# Altium PCB PrototypeV2.PcbDoc
Units mm, origin at the board's own origin, x right, y up, seen from the top; angles counter-clockwise.
Board outline 152.4 x 101.6 mm, 2 copper layers (Top Layer, Bottom Layer); 17 components, 39 nets, 65 pads, 0 vias.
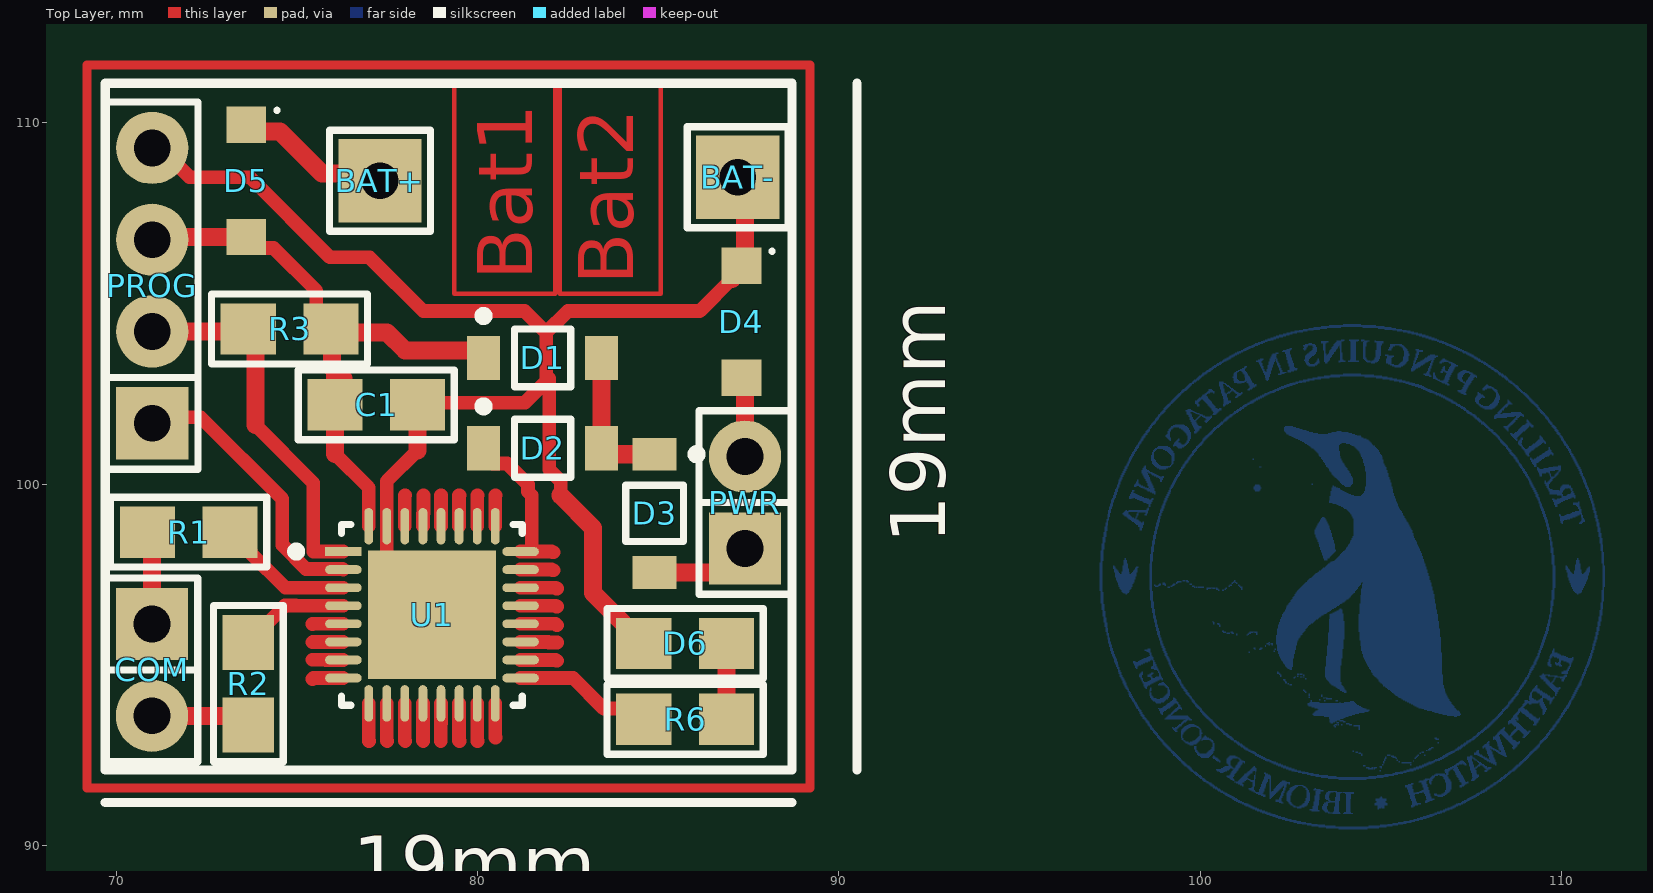
[diagram p0: Top Layer view]
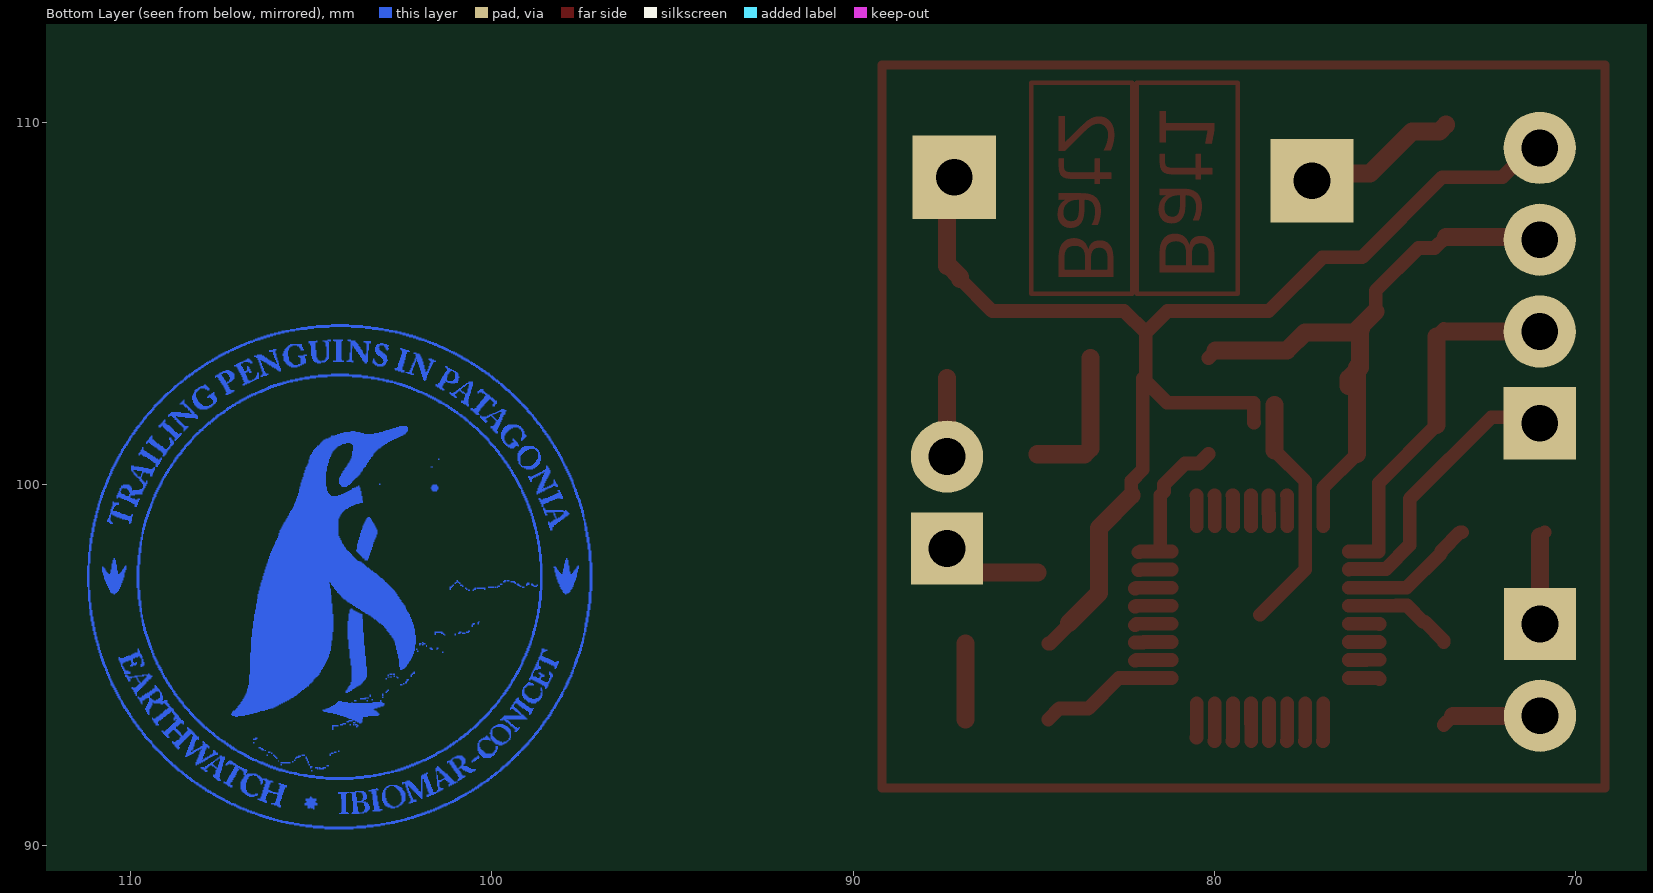
[diagram p1: Bottom Layer view, seen from below]
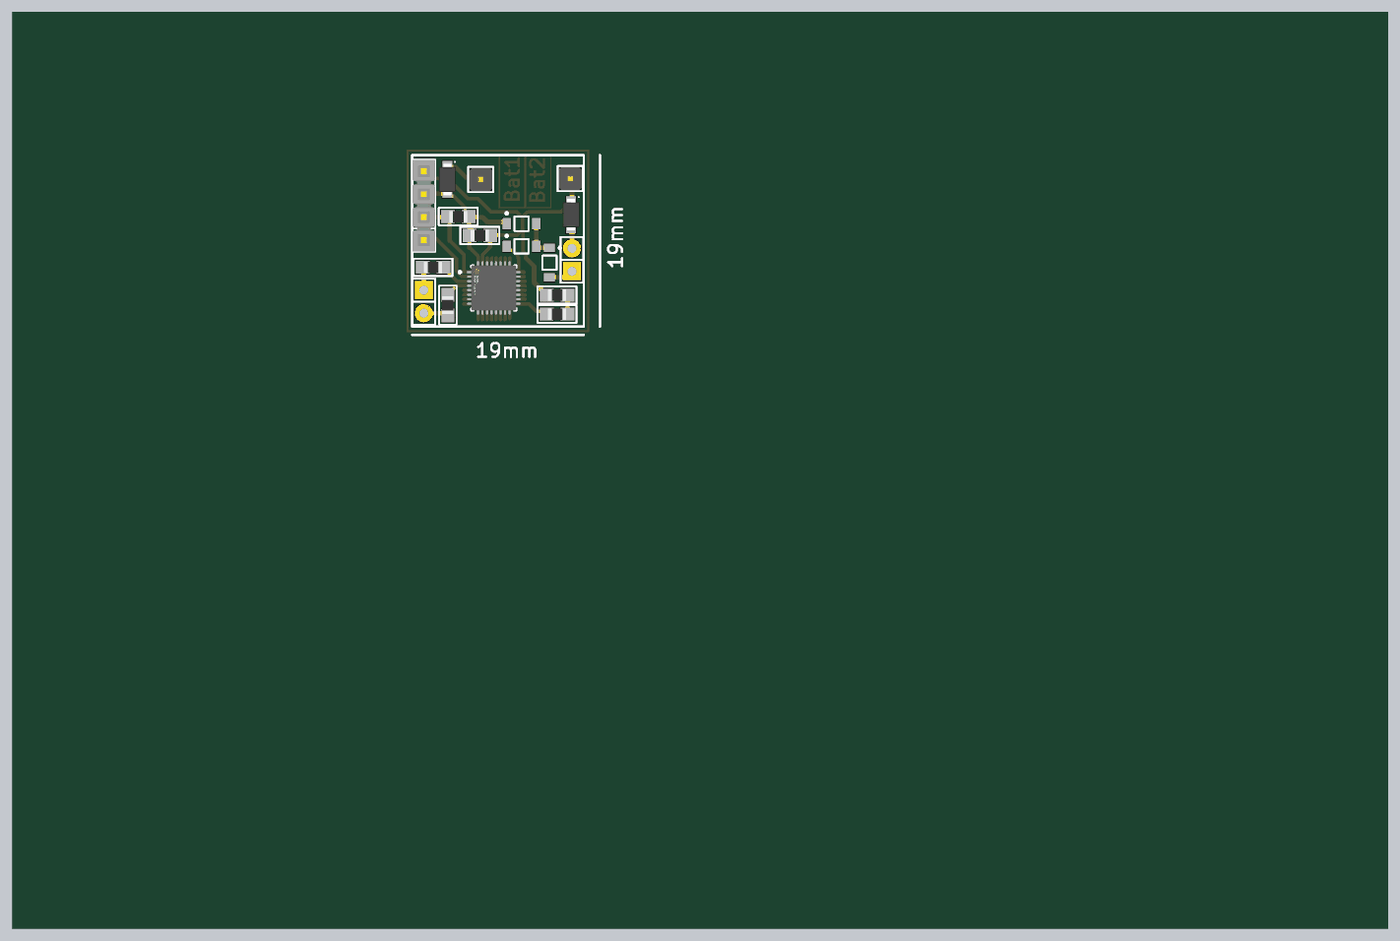
[diagram p2: 3D render of the assembled board from above, using the file's embedded part models]

## Layer stack, top to bottom
Top Solder: solder mask 0.0102, Solder Resist, Dk 3.5
Top Layer: signal copper 0.0356
Dielectric 1: dielectric 0.32, FR-4, Dk 4.8
Bottom Layer: signal copper 0.0356
Bottom Solder: solder mask 0.0102, Solder Resist, Dk 3.5

## Board outline
25.4,25.4 177.8,25.4 177.8,127 25.4,127

## Design rules (kind name [scope] priority, off if disabled: settings)
Clearance [All] p1: gap=0.1 ignorepadtopadclearanceinfootprint=TRUE
PolygonConnect [All] p1: connectstyle=Relief reliefconductorwidth=0.254 reliefentries=4 polygonreliefangle="90 Angle" airgapwidth=0.254
RoutingVias [All] p1: holewidth=0.711 width=1.27 viastyle="Through Hole" minholewidth=0.711 minwidth=1.27 maxholewidth=0.711 maxwidth=1.27
SolderMaskExpansion [All] p1: expansion=0.102 istentingtop=FALSE
Width [All] p1: maxlimit=0.5 minlimit=0.3 preferedwidth=0.5
30 further rules are at their usual default settings.

## Components (designator, comment, footprint, x,y, rotation, side; value= is the part's Value field where it differs from the comment)
BAT+ "TP" TPTH 77.3,108.4 r90 top
BAT- "TP" TPTH 87.2,108.5 r90 top
C1 "100nF" 0805 77.2,102.2 r0 top
COM "CON2" SIP2 70.993,94.869 r270 top
D1 "1N4148WXHE3-TP" ONSC-SOD-123-2-425-04_V 81.8,103.5 r0 top
D2 "1N4148WXHE3-TP" ONSC-SOD-123-2-425-04_V 81.8,101 r0 top
D3 "1N4148WXHE3-TP" ONSC-SOD-123-2-425-04_V 84.9,99.2 r270 top
D4 "BAS100AS" SODFL350X110-2N 87.3,104.5 r270 top
D5 "BAS100AS" SODFL350X110-2N 73.6,108.4 r270 top
D6 "LED" 0805 85.743,95.6 r180 top
PROG "CON4" SIP4 71,105.5 r90 top
PWR "CON2" SIP2 87.4,99.5 r90 top
R1 "100" 0805 72.009,98.679 r180 top
R2 "100" 0805 73.66,94.488 r90 top
R3 "47k" 0805 74.8,104.3 r180 top
R6 "2k2" 0805 85.743,93.5 r180 top
U1 "MSP430FR2476TRHBR" FP-RHB0032E-IPC_A 78.74,96.393 r0 top

## Footprints (in the part's own frame and the unit in brackets; to place one, negate y for a bottom-side part, rotate by r counter-clockwise, add the part's x,y. Pads: shape width x height; smd on the part's side, far side on the other; paste and mask are expansions set on the pad)
0805 [mil] "Pasivo 0805"
  rect 60x56 smd: 1(-45,0) 2(45,0)
  silkscreen extent -85,-38 85,38, body extent -40,-24 39,25, height 15
FP-RHB0032E-IPC_A [mm]
  rect 1.01x0.242 smd paste+0 mask+0: 1(-2.451,1.75)
  rrect100% 1.01x0.242 smd paste+0 mask+0: 2(-2.451,1.25) 3(-2.451,0.75) 4(-2.451,0.25) 5(-2.451,-0.25) 6(-2.451,-0.75) 7(-2.451,-1.25) 8(-2.451,-1.75) 17(2.451,-1.75) 18(2.451,-1.25) 19(2.451,-0.75) 20(2.451,-0.25) 21(2.451,0.25) 22(2.451,0.75) 23(2.451,1.25) 24(2.451,1.75)
  rrect100% 0.242x1.01 smd paste+0 mask+0: 9(-1.75,-2.451) 10(-1.25,-2.451) 11(-0.75,-2.451) 12(-0.25,-2.451) 13(0.25,-2.451) 14(0.75,-2.451) 15(1.25,-2.451) 16(1.75,-2.451) 25(1.75,2.451) 26(1.25,2.451) 27(0.75,2.451) 28(0.25,2.451) 29(-0.25,2.451) 30(-0.75,2.451) 31(-1.25,2.451) 32(-1.75,2.451)
  rect 3.55x3.55 smd paste-1000 mask+0: 33(0,0)
  silkscreen extent -3.88,-2.5 2.5,2.5, body extent -3.46,-3.46 3.46,3.46, height 0.25
ONSC-SOD-123-2-425-04_V [mm] "SOD, 2-Leads, Body 2.69x1.6mm"
  rect 0.91x1.22 smd: 1(-1.635,0) 2(1.635,0)
  silkscreen extent -1.76,-0.8 0.78,1.28, body extent -1.35,-0.8 1.35,0.8, height 1.35
SIP2 [mm]
  rect 2x2 hole 1.016: 1(-1.27,0)
  round 2 hole 1.016: 2(1.27,0)
  silkscreen extent -2.54,-1.27 2.54,1.27
SIP4 [mm]
  rect 2x2 hole 1.016: 1(-3.81,0)
  round 2 hole 1.016: 2(-1.27,0) 3(1.27,0) 4(3.81,0)
  silkscreen extent -5.08,-1.27 5.08,1.27, body extent -5.08,-1.27 5.08,1.27, height 8.38
SODFL350X110-2N [mm] "SODFL, 2-Leads, Body 1.70x3.50mm, IPC Medium Density"
  rect 1x1.1 smd: 1(-1.55,0) 2(1.55,0)
  silkscreen extent -2,0.8 -1.9,0.9, body extent -1.75,-0.95 1.75,0.95, height 1.1
TPTH [mm]
  rect 2.3x2.3 hole 1.016: 1(0,0)
  silkscreen extent -1.4,-1.4 1.4,1.4, body extent -1.27,-1.27 1.27,1.27, height 6.04

## Part data
C1: library part CAP
D1 D2 D3: library part CMP-0895-00001-2, "Switching Diode, 2-Pin SOD-123, Pb-Free, Tape and Reel", Manufacturer="On Semiconductor", PartNumber=MMSD4148T1G, ComponentLink1Description="Manufacturer URL", ComponentLink1URL=http://www.onsemi.com/, ComponentLink2Description=Datasheet, ComponentLink2URL=http://www.onsemi.com/pub_link/Collateral/MMSD4148T1-D.PDF, ComponentLink3Description="Package Specification", ComponentLink3URL=http://www.onsemi.com/pub_link/Collateral/425-04.PDF, Configuration=Single, DatasheetVersion="Rev. 11", IF Max (A)=0.2, Mounting Technology="Surface Mount", PackageDescription="2-Pin SOD, Body 1.6 x 2.69 mm", PackageReference=SOD-123-2-425-04, PackageVersion="Rev. G, 10/2009", Packing="Tape and Reel", RoHS=TRUE, trr Max (ns)=4
D4 D5: library part "DIODO SCHOTTKY"
R1 R2 R3 R6: library part RES
U1: library part CMP-04869-000099-1, "IC MCU 16BIT 64.5KB FRAM 32VQFN"

## Nets (pads, with @x,y where several pads share a name; then routed paths per layer and width w, separated by ;. In a path a pad name is that pad's centre, name@x,y a point inside that pad or via, vN(x,y) a via of type N, cw(c..) or ccw(c..) an arc to the next point about the centre after c; other vN are vias at no path point)
Base_Detect: D2.1 U1.24 | length 4.4
  Top Layer w0.381: D2.1@80.165,100.845 80.429,100.58 80.82,100.58 81.4,100 81.4,99.8 81.5,99.7 81.5,98.212 U1.24@81.431,98.143 ; U1.24 U1.24@81.431,98.143 ; 82.1,98.124 82.076,98.124 82.057,98.143 U1.24@81.431,98.143
DVCC: C1.1 D1.1 D5.2 PROG.3 R3.1 U1.32 | length 17.5
  Top Layer w0.381: PROG.3 PROG.3@71.08,106.85 ; D5.2 73.91,106.54 74.36,106.54 75.54,105.36 R3.1@75.54,104.784 ; 76.057,100.843 76.99,99.91 U1.32 ; D1.1@79.965,103.7 D1.1
  Top Layer w0.5: PROG.3@71.08,106.85 D5.2 ; R3.1@75.54,104.784 R3.1@76.057,104.267 ; R3.1 R3.1@75.976,104.267 ; 76.057,100.843 C1.1 76.057,103.24 ; C1.1@76.285,102.721 76.285,102.931 75.976,103.24 R3.1@75.976,104.267 ; D1.1@79.965,103.7 78,103.7 77.5,104.2 76.043,104.2 R3.1@75.976,104.267
DVSS: BAT-.1 C1.2 D4.1 D6.2 PROG.4 U1.31 U1.33 | length 43.3
  Top Layer w0.381: PROG.4@70.993,109.982 PROG.4@71.332,109.643 ; PROG.4 71.223,109.31 72.033,108.5 73.7,108.5 75.917,106.283 77.017,106.283 78.5,104.8 81.3,104.8 81.9,104.2 ; 78.343,100.943 77.49,100.09 U1.31 77.49,97.643 U1.33 ; C1.2@78.904,101.712 78.915,101.723 78.915,102.262 81.313,102.262 81.9,102.848 81.9,104.2 ; 81.984,102.933 81.984,100.416 82.3,100.1 82.3,99.7 ; D6.2@84.028,96.171 84.028,96.121 84.549,95.6 D6.2 ; D4.1@87.04,105.69 86.15,104.8 82.5,104.8 81.9,104.2 ; BAT-.1@87.53,108.5 BAT-.1@87.53,109.22
  Top Layer w0.5: 78.343,100.943 C1.2 ; 82.3,99.7 83.2,98.8 83.2,97 D6.2@84.028,96.171 ; D4.1@87.04,105.69 87.04,105.74 87.35,106.05 87.4,106.05 87.4,108.4 BAT-.1@87.3,108.5
GNDext: D4.2 PWR.2 | length 2.2
  Top Layer w0.5: PWR.2 D4.2@87.4,102.95
NC: U1.20 | length 1
  Top Layer w0.381: U1.20 82.157,96.143 82.195,96.105 82.2,96.105
NetBAT+_1: BAT+.1 D5.1 | length 4.3
  Top Layer w0.5: D5.1 73.78,109.77 74.53,109.77 75.693,108.607 77.093,108.607 BAT+.1
NetD1_2: D1.2 D2.2 D3.1 | length 4
  Top Layer w0.5: D1.2 D2.2 83.6,100.835 D3.1
NetD6_1: D6.1 R6.1 | length 2.1
  Top Layer w0.5: R6.1 D6.1
P1.0: U1.7 | length 0.9
  Top Layer w0.381: 75.438,95.15 75.792,95.15 75.799,95.143 U1.7
P1.1: U1.8 | length 0.9
  Top Layer w0.381: 75.438,94.615 75.466,94.643 U1.8
P1.2: U1.9 | length 1
  Top Layer w0.381: U1.9 76.99,92.91 77,92.9
P1.3: U1.10 | length 1
  Top Layer w0.381: U1.10 77.49,92.91 77.5,92.9
P1.4: R1.1 U1.3 | length 3.8
  Top Layer w0.381: R1.1 73.203,98.679 73.724,98.158 73.724,98.108 74.688,97.143 U1.3
P1.5: R2.2 U1.4 | length 3.1
  Top Layer w0.381: R2.2 73.66,95.682 74.181,96.203 74.231,96.203 74.676,96.647 74.965,96.647 74.969,96.643 U1.4
P1.6: U1.5 | length 0.9
  Top Layer w0.381: 75.438,96.139 75.442,96.143 U1.5
P1.7: U1.6 | length 0.9
  Top Layer w0.381: 75.438,95.631 75.45,95.643 U1.6
P2.0: U1.29 | length 0.9
  Top Layer w0.381: U1.29 78.49,99.19 78.509,99.209 78.509,99.7
P2.1: U1.30 | length 0.9
  Top Layer w0.381: U1.30 77.99,99.69 78,99.7
P2.2: U1.11 | length 1
  Top Layer w0.381: U1.11 77.99,92.91 78,92.9
P2.3: U1.14 | length 1
  Top Layer w0.381: U1.14 79.49,92.91 79.5,92.9
P2.4: R6.2 U1.17 | length 3.9
  Top Layer w0.381: U1.17 82.649,94.643 83.49,93.802 84.298,93.802 R6.2
P2.5: U1.18 | length 1
  Top Layer w0.381: U1.18 82.157,95.143 82.176,95.124 82.2,95.124
P2.6: U1.19 | length 1
  Top Layer w0.381: U1.19 81.957,95.643 81.976,95.624 82.2,95.624
P2.7: U1.25 | length 0.9
  Top Layer w0.381: U1.25 80.49,99.69 80.5,99.7
P3.0: U1.12 | length 1
  Top Layer w0.381: U1.12 78.49,92.91 78.5,92.9
P3.1: U1.16 | length 0.9
  Top Layer w0.381: U1.16 80.49,93.01 80.5,93
P3.2: U1.27 | length 0.9
  Top Layer w0.381: U1.27 79.49,99.69 79.5,99.7
P3.3: U1.13 | length 1
  Top Layer w0.381: 78.981,92.9 78.981,93.381 78.99,93.39 U1.13
P3.4: U1.15 | length 1
  Top Layer w0.381: U1.15 79.99,92.91 80,92.9
P3.5: U1.26 | length 0.9
  Top Layer w0.381: U1.26 79.99,99.69 80,99.7
P3.6: U1.28 | length 0.9
  Top Layer w0.381: U1.28 78.99,99.69 79,99.7
P3.7: U1.21 | length 1
  Top Layer w0.381: U1.21 82.157,96.643 82.176,96.624 82.2,96.624
P4.0: U1.22 | length 1
  Top Layer w0.381: U1.22 82.157,97.143 82.176,97.124 82.2,97.124
P4.1: U1.23 | length 0.9
  Top Layer w0.381: U1.23 82.057,97.643 82.076,97.624 82.1,97.624
RSTn: PROG.2 R3.2 U1.1 | length 10.4
  Top Layer w0.381: R3.2@73.587,104.23 R3.2 R3.2@73.86,104.097 ; 73.86,101.64 75.457,100.043 75.457,98.143 U1.1
  Top Layer w0.5: PROG.2 R3.2@73.587,104.23 ; 73.86,101.64 R3.2@73.86,104.097
RX: COM.2 R2.1 | length 2.8
  Top Layer w0.381: R2.1@73.406,93.599 R2.1
  Top Layer w0.5: COM.2 R2.1@73.406,93.599
TEST: PROG.1 U1.2 | length 8
  Top Layer w0.381: PROG.1@70.993,102.362 71.496,101.859 72.341,101.859 74.6,99.6 74.6,98.32 75.258,97.662 76.27,97.662 U1.2
TX: COM.1 R1.2 | length 2.6
  Top Layer w0.381: R1.2 R1.2@70.993,98.552
  Top Layer w0.5: COM.1 R1.2@70.993,98.552
Vext: D3.2 PWR.1 | length 2.8
  Top Layer w0.5: D3.2 86.735,97.565 PWR.1
copper on no net: | length 114.5
  Top Layer w0.127: 79.356,105.272 79.356,111.114 82.15,111.114 82.15,105.272 79.356,105.272 ; 82.277,105.272 82.277,111.114 85.071,111.114 85.071,105.272 82.277,105.272
  Top Layer w0.254: 69.2,91.6 89.2,91.6 89.2,111.6 69.2,111.6 69.2,91.6

## Other copper
Top Layer:
  text "Bat1" at 81.515,105.653 h1.52 r90
  text "Bat2" at 84.309,105.526 h1.52 r90
Bottom Layer:
  drawing of 186 lines, arcs and shapes, not listed

## Silkscreen, mask and mechanical layers (free items; w line width, h text height)
Top Overlay:
  lines w0.254: 69.7,91.2 88.7,91.2 ; 90.5,92.1 90.5,111.1 ; 69.7,92.1 88.7,92.1 88.7,111.1 69.7,111.1 69.7,92.1
  text "19mm" at 92.946,98.354 h1.52 r90
  text "19mm" at 76.554,88.754 h1.52